# Altium PCB Print2.PcbDoc
Units mm, origin at the board's own origin, x right, y up, seen from the top; angles counter-clockwise.
Board outline 237.62 x 189.1 mm, 2 copper layers (Top Layer, Bottom Layer); 42 components, 0 nets, 250 pads, 0 vias.
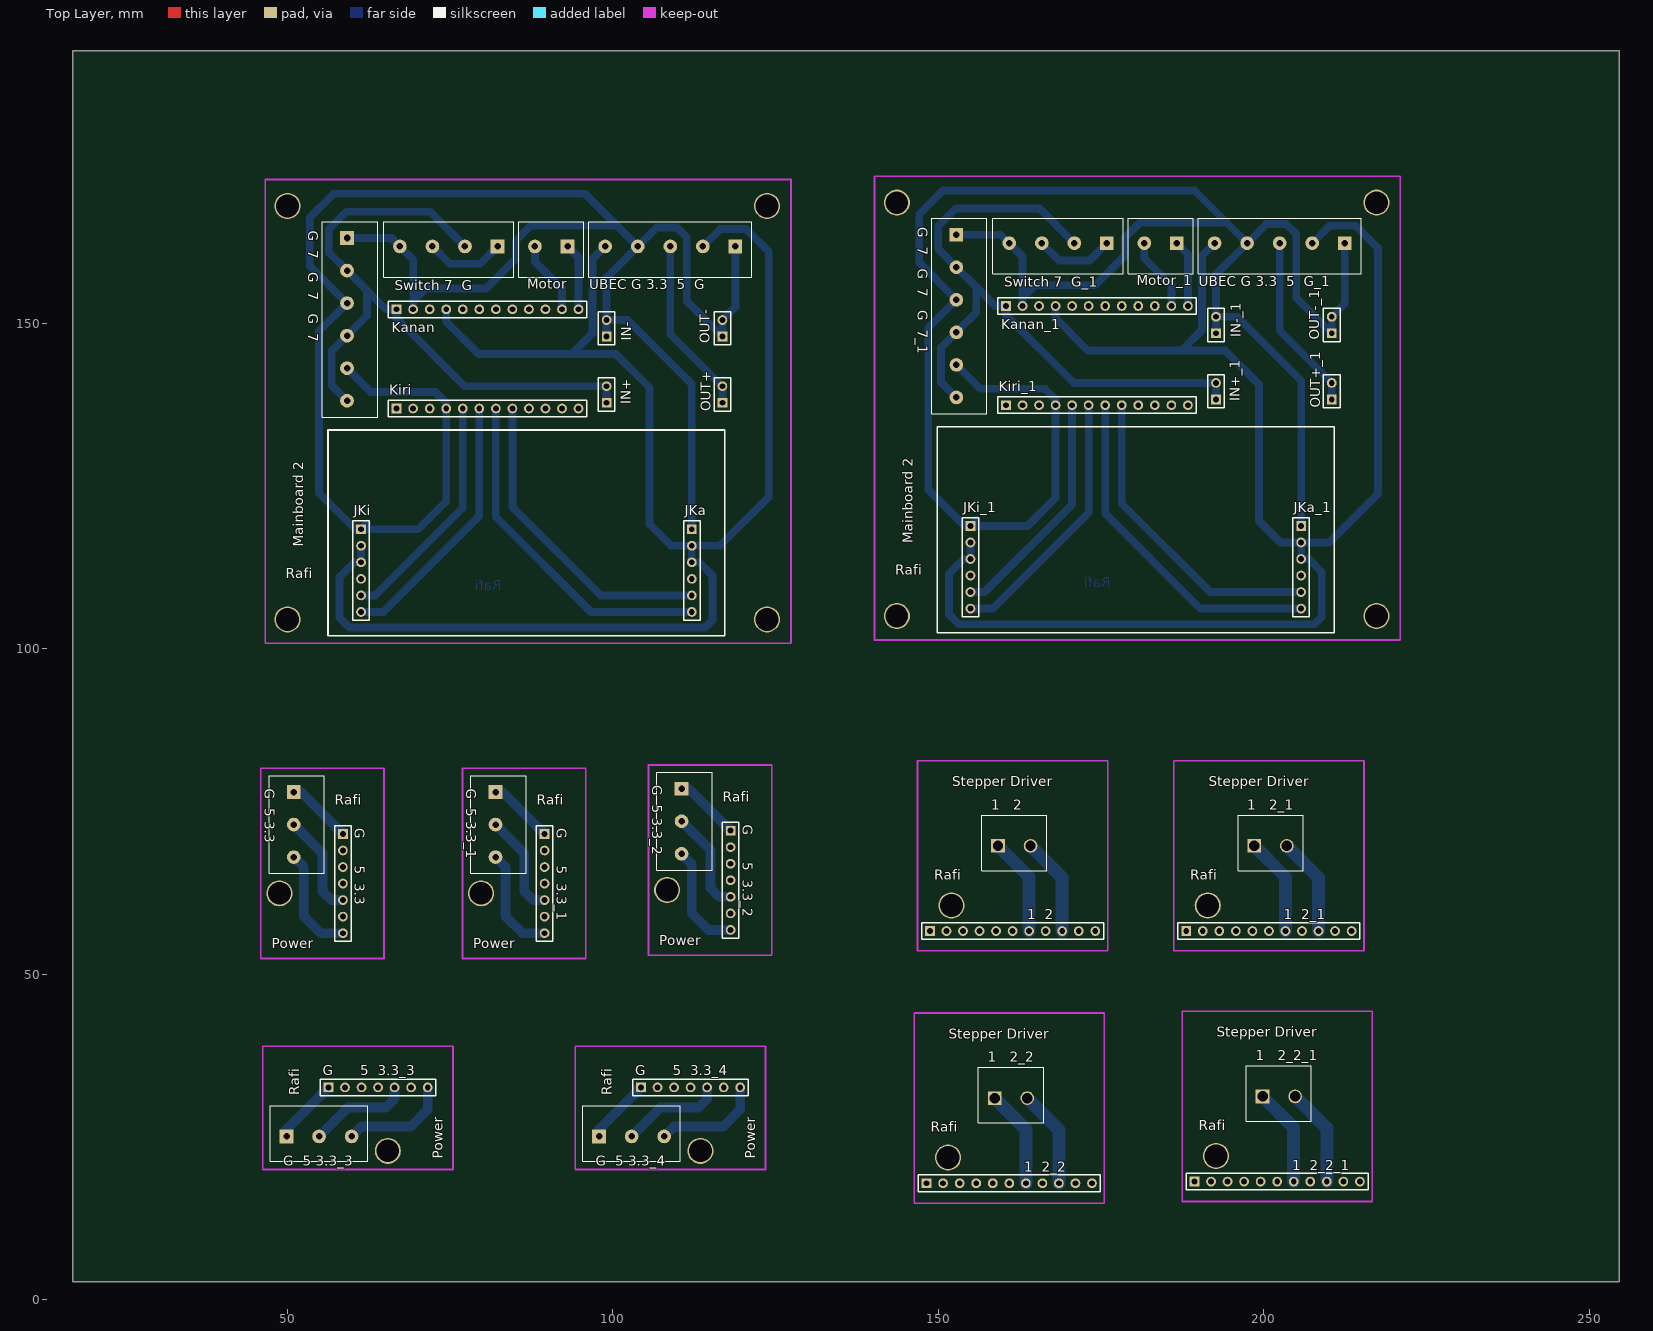
[diagram p0: Top Layer view]
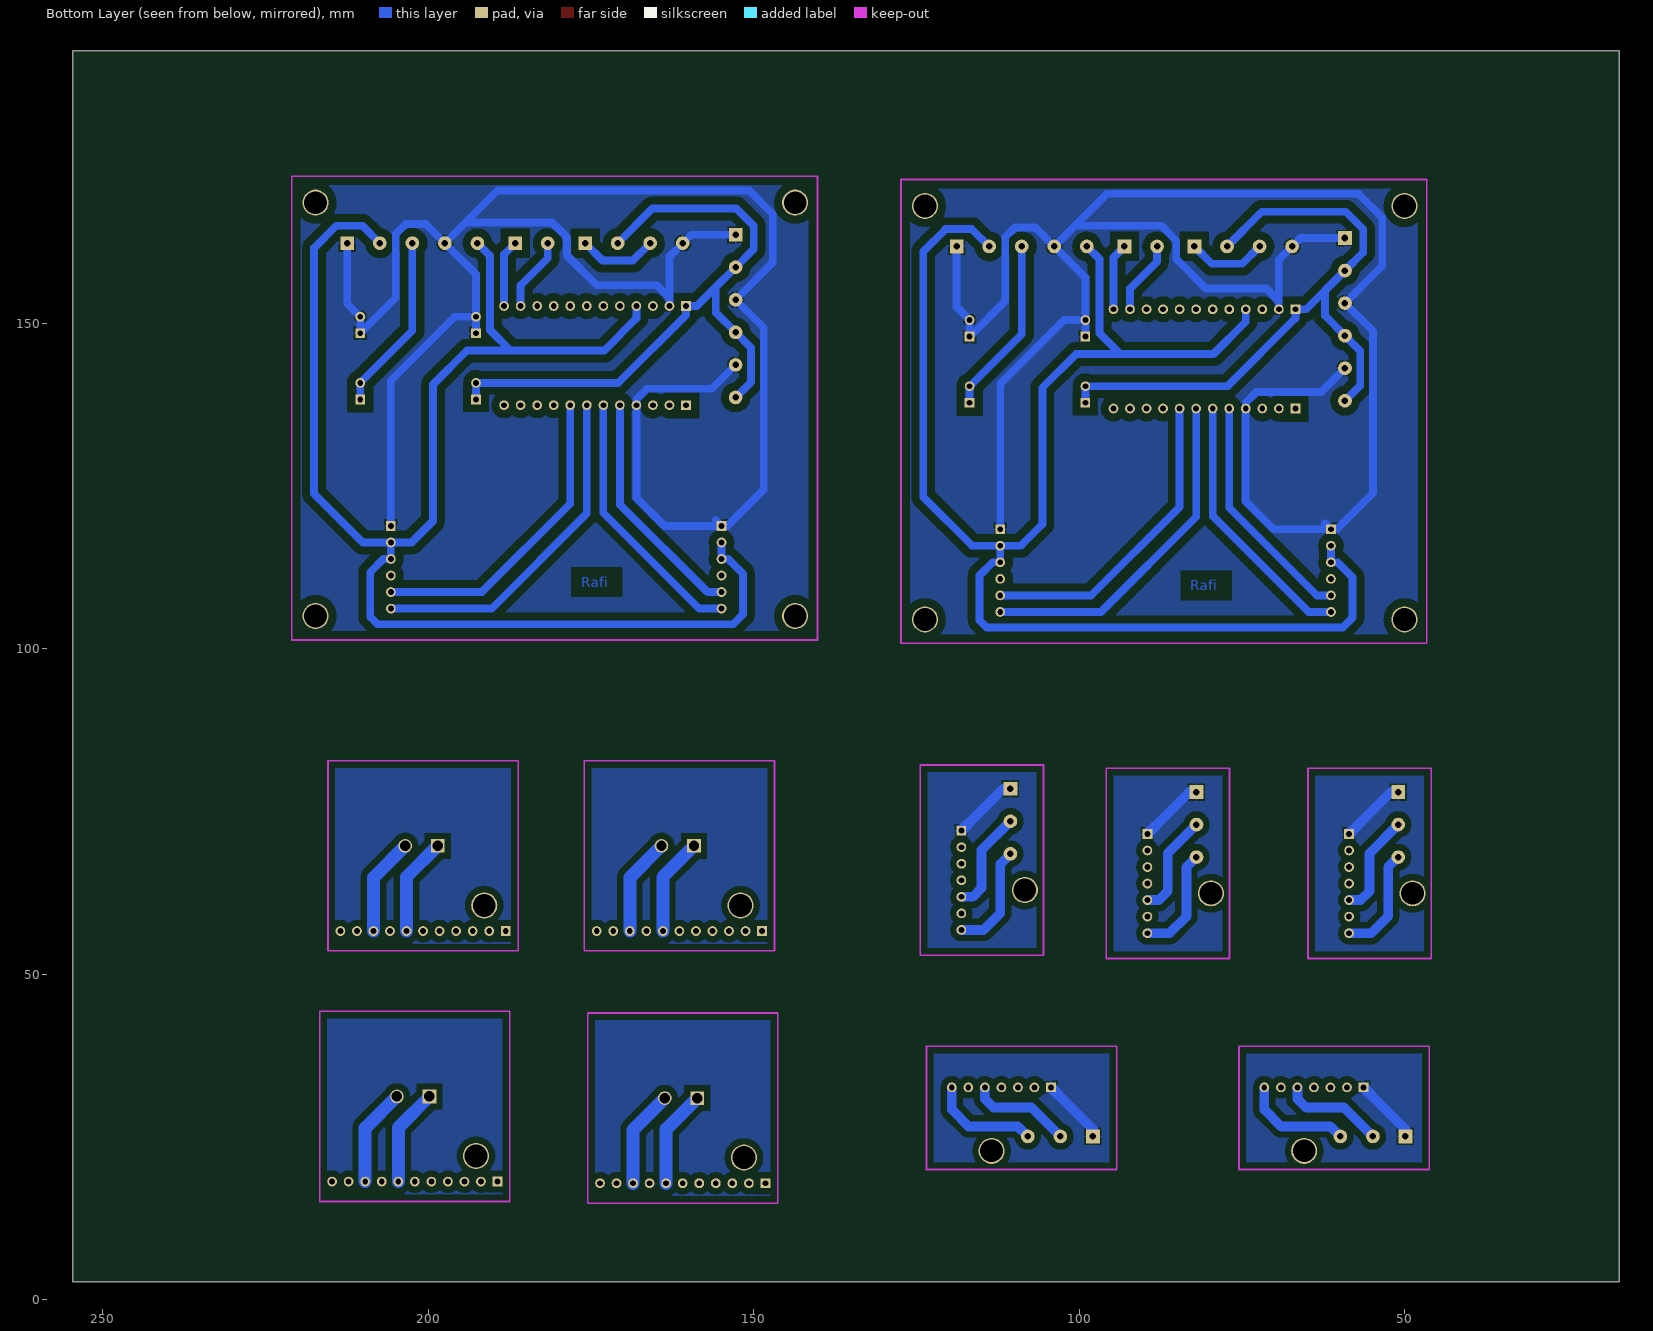
[diagram p1: Bottom Layer view, seen from below]

## Layer stack, top to bottom
Top Solder: solder mask 0.0102, Solder Resist, Dk 3.5
Top Layer: signal copper 0.0356
Dielectric 1: dielectric 0.32, FR-4, Dk 4.8
Bottom Layer: signal copper 0.0356
Bottom Solder: solder mask 0.0102, Solder Resist, Dk 3.5

## Board outline
17.018,2.794 17.018,191.897 254.635,191.897 254.635,2.794

## Design rules (kind name [scope] priority, off if disabled: settings)
Clearance [All] p1: gap=0.25
PolygonConnect [All] p1: connectstyle=Relief reliefconductorwidth=0.254 reliefentries=4 polygonreliefangle="90 Angle" airgapwidth=0.254
RoomDefinition stepper_2 [InComponentClass('stepper')] p1: confinementstyle=ConfineIn formatcopy=TRUE lockcomponents=FALSE outline 41.275,-38.735 92.075,-38.735 92.075,-13.335 41.275,-13.335
RoutingVias [All] p1: holewidth=0.711 width=1.27 viastyle="Through Hole" minholewidth=0.711 minwidth=1.27 maxholewidth=0.711 maxwidth=1.27
SolderMaskExpansion [All] p1: expansion=0.102
Width [All] p1: maxlimit=3 minlimit=0.254 preferedwidth=1
30 further rules are at their usual default settings.

## Components (designator, comment, footprint, x,y, rotation, side; value= is the part's Value field where it differs from the comment)
"1  2" "Header 11" HDR1X11 148.717,56.642 r0 top (schematic designator P?)
"1  2_1" "Header 11" HDR1X11 188.087,56.642 r0 top (schematic designator P?)
"1  2_2" "Header 11" HDR1X11 148.209,17.907 r0 top (schematic designator P?)
"1  2_2_1" "Header 11" HDR1X11 189.357,18.161 r0 top (schematic designator P?)
"1   2" "WE-Terminal Blocks Plugable Type 691311700002" 691311700002#1 161.671,69.723 r0 top (schematic designator C?)
"1   2_1" "WE-Terminal Blocks Plugable Type 691311700002" 691311700002#1 201.041,69.723 r0 top (schematic designator C?)
"1   2_2" "WE-Terminal Blocks Plugable Type 691311700002" 691311700002#1 161.163,30.988 r0 top (schematic designator C?)
"1   2_2_1" "WE-Terminal Blocks Plugable Type 691311700002" 691311700002#1 202.311,31.242 r0 top (schematic designator C?)
"G  5 3.3" "WE-Terminal Blocks Plugable Type 691311700003" 691311700003 51.003,73 r270 top (schematic designator C?)
"G  5 3.3_1" "WE-Terminal Blocks Plugable Type 691311700003" 691311700003 81.991,73 r270 top (schematic designator C?)
"G  5 3.3_2" "WE-Terminal Blocks Plugable Type 691311700003" 691311700003 110.566,73.508 r270 top (schematic designator C?)
"G  5 3.3_3" "WE-Terminal Blocks Plugable Type 691311700003" 691311700003 54.889,25.095 r0 top (schematic designator C?)
"G  5 3.3_4" "WE-Terminal Blocks Plugable Type 691311700003" 691311700003 102.895,25.095 r0 top (schematic designator C?)
"G  7   G  7   G  7" "WE-Terminal Blocks Plugable Type 691311700006" 691311700006 59.182,150.599 r270 top (schematic designator "Out 7V")
"G  7   G  7   G  7_1" "WE-Terminal Blocks Plugable Type 691311700006" 691311700006 152.781,151.107 r270 top (schematic designator "Out 7V")
"G      5  3.3" "Header 7" HDR1X7 58.547,71.557 r270 top (schematic designator P?)
"G      5  3.3_1" "Header 7" HDR1X7 89.535,71.557 r270 top (schematic designator P?)
"G      5  3.3_2" "Header 7" HDR1X7 118.11,72.065 r270 top (schematic designator P?)
"G      5  3.3_3" "Header 7" HDR1X7 56.332,32.639 r0 top (schematic designator P?)
"G      5  3.3_4" "Header 7" HDR1X7 104.338,32.639 r0 top (schematic designator P?)
IN+ "Header 2" HDR1X2 99.06,137.795 r90 top
IN+_1 "Header 2" HDR1X2 192.659,138.303 r90 top (schematic designator IN+)
IN- "Header 2" HDR1X2 99.06,147.955 r90 top
IN-_1 "Header 2" HDR1X2 192.659,148.463 r90 top (schematic designator IN-)
JKa "Header 6" HDR1X6 112.141,118.364 r270 top
JKa_1 "Header 6" HDR1X6 205.74,118.872 r270 top (schematic designator JKa)
JKi "Header 6" HDR1X6 61.341,118.364 r270 top
JKi_1 "Header 6" HDR1X6 154.94,118.872 r270 top (schematic designator JKi)
Kanan "Header 12" HDR1X12 66.802,152.146 r0 top
Kanan_1 "Header 12" HDR1X12 160.401,152.654 r0 top (schematic designator Kanan)
Kiri "Header 12" HDR1X12 66.802,136.906 r0 top
Kiri_1 "Header 12" HDR1X12 160.401,137.414 r0 top (schematic designator Kiri)
Motor "WE-Terminal Blocks Plugable Type 691311700002" 691311700002#2 90.551,161.799 r180 top
Motor_1 "WE-Terminal Blocks Plugable Type 691311700002" 691311700002#2 184.15,162.307 r180 top (schematic designator Motor)
OUT+ "Header 2" HDR1X2 116.84,137.795 r90 top
OUT+_1 "Header 2" HDR1X2 210.439,138.303 r90 top (schematic designator OUT+)
OUT- "Header 2" HDR1X2 116.84,147.955 r90 top
OUT-_1 "Header 2" HDR1X2 210.439,148.463 r90 top (schematic designator OUT-)
"Switch 7  G" "WE-Terminal Blocks Plugable Type 691311700004" 691311700004 74.803,161.799 r180 top (schematic designator "Source n Saklar")
"Switch 7  G_1" "WE-Terminal Blocks Plugable Type 691311700004" 691311700004 168.402,162.307 r180 top (schematic designator "Source n Saklar")
"UBEC G 3.3  5  G" "WE-Terminal Blocks Plugable Type 691311700005" 691311700005 108.839,161.799 r180 top (schematic designator "Out n Ubec5 In")
"UBEC G 3.3  5  G_1" "WE-Terminal Blocks Plugable Type 691311700005" 691311700005 202.438,162.307 r180 top (schematic designator "Out n Ubec5 In")

## Footprints (in the part's own frame and the unit in brackets; to place one, negate y for a bottom-side part, rotate by r counter-clockwise, add the part's x,y. Pads: shape width x height; smd on the part's side, far side on the other; paste and mask are expansions set on the pad)
691311700002#1 [mm] "5.00mm - Open Vertical PCB Header - 02p"
  rect 2.1x2.1 hole 1.6: 1(-2.5,0)
  round 2.1 hole 1.6: 2(2.5,0)
  silkscreen extent -5,-3.8 5,4.7, body extent -5,-3.8 5,4.7, height 12.01
691311700002#2 [mm] "5.00mm - Open Vertical PCB Header - 02p"
  rect 2.1x2.1 hole 1: 1(-2.5,0)
  round 2.1 hole 1: 2(2.5,0)
  silkscreen extent -5,-3.8 5,4.7, body extent -5,-3.8 5,4.7, height 12.01
691311700003 [mm] "5.00mm - Open Vertical PCB Header - 03p"
  rect 2.1x2.1 hole 1: 1(-5,0)
  round 2.1 hole 1: 2(0,0) 3(5,0)
  silkscreen extent -7.5,-3.8 7.5,4.7, body extent -7.5,-3.8 7.5,4.7, height 12.01
691311700004 [mm] "5.00mm - Open Vertical PCB Header - 04p"
  rect 2.1x2.1 hole 1: 1(-7.5,0)
  round 2.1 hole 1: 2(-2.5,0) 3(2.5,0) 4(7.5,0)
  silkscreen extent -10,-3.8 10,4.7, body extent -10,-3.8 10,4.7, height 12.01
691311700005 [mm] "5.00mm - Open Vertical PCB Header - 05p"
  rect 2.1x2.1 hole 1: 1(-10,0)
  round 2.1 hole 1: 2(-5,0) 3(0,0) 4(5,0) 5(10,0)
  silkscreen extent -12.5,-3.8 12.5,4.7, body extent -12.5,-3.8 12.5,4.7, height 12.01
691311700006 [mm] "5.00mm - Open Vertical PCB Header - 06p"
  rect 2.1x2.1 hole 1: 1(-12.5,0)
  round 2.1 hole 1: 2(-7.5,0) 3(-2.5,0) 4(2.5,0) 5(7.5,0) 6(12.5,0)
  silkscreen extent -15,-3.8 15,4.7, body extent -15,-3.8 15,4.7, height 12.01
HDR1X2 [mm] "Connector; Header; 2 Position"
  rect 1.5x1.5 hole 0.9: 1(0,0)
  round 1.5 hole 0.9: 2(2.54,0)
  silkscreen extent -1.27,-1.27 3.81,1.27
HDR1X6 [mm] "Connector; Header; 6 Position"
  rect 1.5x1.5 hole 0.9: 1(0,0)
  round 1.5 hole 0.9: 2(2.54,0) 3(5.08,0) 4(7.62,0) 5(10.16,0) 6(12.7,0)
  silkscreen extent -1.27,-1.27 13.97,1.27
HDR1X7 [mm] "Connector; Header; 7 Position"
  rect 1.5x1.5 hole 0.9: 1(0,0)
  round 1.5 hole 0.9: 2(2.54,0) 3(5.08,0) 4(7.62,0) 5(10.16,0) 6(12.7,0) 7(15.24,0)
  silkscreen extent -1.27,-1.27 16.51,1.27
HDR1X11 [mm] "Connector; Header; 11 Position"
  rect 1.5x1.5 hole 0.9: 1(0,0)
  round 1.5 hole 0.9: 2(2.54,0) 3(5.08,0) 4(7.62,0) 5(10.16,0) 6(12.7,0) 7(15.24,0) 8(17.78,0) 9(20.32,0) 10(22.86,0) 11(25.4,0)
  silkscreen extent -1.27,-1.27 26.67,1.27
HDR1X12 [mm] "Connector; Header; 12 Position"
  rect 1.5x1.5 hole 0.9: 1(0,0)
  round 1.5 hole 0.9: 2(2.54,0) 3(5.08,0) 4(7.62,0) 5(10.16,0) 6(12.7,0) 7(15.24,0) 8(17.78,0) 9(20.32,0) 10(22.86,0) 11(25.4,0) 12(27.94,0)
  silkscreen extent -1.27,-1.27 29.21,1.27

## Part data
"1  2" "1  2_1" "1  2_2" "1  2_2_1": "Header, 11-Pin"
"1   2" "1   2_1" "1   2_2" "1   2_2_1" "G  5 3.3" "G  5 3.3_1" "G  5 3.3_2" "G  5 3.3_3" "G  5 3.3_4" "G  7   G  7   G  7" "G  7   G  7   G  7_1" Motor Motor_1 "Switch 7  G" "Switch 7  G_1" "UBEC G 3.3  5  G" "UBEC G 3.3  5  G_1": "WR-TBL Terminal block - serie 3117 - 5.00mm"
"G      5  3.3" "G      5  3.3_1" "G      5  3.3_2" "G      5  3.3_3" "G      5  3.3_4": "Header, 7-Pin"
IN+ IN+_1 IN- IN-_1 OUT+ OUT+_1 OUT- OUT-_1: "Header, 2-Pin"
JKa JKa_1 JKi JKi_1: "Header, 6-Pin"
Kanan Kanan_1 Kiri Kiri_1: "Header, 12-Pin"

## Free pads (board coordinates)
  round 4 hole 3.5: 0(50.038,104.521) 0(50.038,168.021) 0(123.698,104.521) 0(123.698,168.021) 0(143.637,105.029) 0(143.637,168.529) 0(217.297,105.029) 0(217.297,168.529) 8(48.793,62.438) 8(48.793,62.438) 8(65.451,22.885) 8(65.451,22.885) 8(79.781,62.438) 8(79.781,62.438) 8(108.356,62.946) 8(108.356,62.946) 8(113.457,22.885) 8(113.457,22.885) 10(151.511,21.844) 10(151.511,21.844) 10(152.019,60.579) 10(152.019,60.579) 10(191.389,60.579) 10(191.389,60.579) 10(192.659,22.098) 10(192.659,22.098)

## Nets (pads, with @x,y where several pads share a name; then routed paths per layer and width w, separated by ;. In a path a pad name is that pad's centre, name@x,y a point inside that pad or via, vN(x,y) a via of type N, cw(c..) or ccw(c..) an arc to the next point about the centre after c; other vN are vias at no path point)
pads on no net: "1  2.1" "1  2.2" "1  2.3" "1  2.4" "1  2.5" "1  2.6" "1  2.7" "1  2.8" "1  2.9" "1  2.10" "1  2.11" "1  2_1.1" "1  2_1.2" "1  2_1.3" "1  2_1.4" "1  2_1.5" "1  2_1.6" "1  2_1.7" "1  2_1.8" "1  2_1.9" "1  2_1.10" "1  2_1.11" "1  2_2.1" "1  2_2.2" "1  2_2.3" "1  2_2.4" "1  2_2.5" "1  2_2.6" "1  2_2.7" "1  2_2.8" "1  2_2.9" "1  2_2.10" "1  2_2.11" "1  2_2_1.1" "1  2_2_1.2" "1  2_2_1.3" "1  2_2_1.4" "1  2_2_1.5" "1  2_2_1.6" "1  2_2_1.7" "1  2_2_1.8" "1  2_2_1.9" "1  2_2_1.10" "1  2_2_1.11" "1   2.1" "1   2.2" "1   2_1.1" "1   2_1.2" "1   2_2.1" "1   2_2.2" "1   2_2_1.1" "1   2_2_1.2" "G  5 3.3.1" "G  5 3.3.2" "G  5 3.3.3" "G  5 3.3_1.1" "G  5 3.3_1.2" "G  5 3.3_1.3" "G  5 3.3_2.1" "G  5 3.3_2.2" "G  5 3.3_2.3" "G  5 3.3_3.1" "G  5 3.3_3.2" "G  5 3.3_3.3" "G  5 3.3_4.1" "G  5 3.3_4.2" "G  5 3.3_4.3" "G  7   G  7   G  7.1" "G  7   G  7   G  7.2" "G  7   G  7   G  7.3" "G  7   G  7   G  7.4" "G  7   G  7   G  7.5" "G  7   G  7   G  7.6" "G  7   G  7   G  7_1.1" "G  7   G  7   G  7_1.2" "G  7   G  7   G  7_1.3" "G  7   G  7   G  7_1.4" "G  7   G  7   G  7_1.5" "G  7   G  7   G  7_1.6" "G      5  3.3.1" "G      5  3.3.2" "G      5  3.3.3" "G      5  3.3.4" "G      5  3.3.5" "G      5  3.3.6" "G      5  3.3.7" "G      5  3.3_1.1" "G      5  3.3_1.2" "G      5  3.3_1.3" "G      5  3.3_1.4" "G      5  3.3_1.5" "G      5  3.3_1.6" "G      5  3.3_1.7" "G      5  3.3_2.1" "G      5  3.3_2.2" "G      5  3.3_2.3" "G      5  3.3_2.4" "G      5  3.3_2.5" "G      5  3.3_2.6" "G      5  3.3_2.7" "G      5  3.3_3.1" "G      5  3.3_3.2" "G      5  3.3_3.3" "G      5  3.3_3.4" "G      5  3.3_3.5" "G      5  3.3_3.6" "G      5  3.3_3.7" "G      5  3.3_4.1" "G      5  3.3_4.2" "G      5  3.3_4.3" "G      5  3.3_4.4" "G      5  3.3_4.5" "G      5  3.3_4.6" "G      5  3.3_4.7" "Switch 7  G.1" "Switch 7  G.2" "Switch 7  G.3" "Switch 7  G.4" "Switch 7  G_1.1" "Switch 7  G_1.2" "Switch 7  G_1.3" "Switch 7  G_1.4" "UBEC G 3.3  5  G.1" "UBEC G 3.3  5  G.2" "UBEC G 3.3  5  G.3" "UBEC G 3.3  5  G.4" "UBEC G 3.3  5  G.5" "UBEC G 3.3  5  G_1.1" "UBEC G 3.3  5  G_1.2" "UBEC G 3.3  5  G_1.3" "UBEC G 3.3  5  G_1.4" "UBEC G 3.3  5  G_1.5" IN+.1 IN+.2 IN+_1.1 IN+_1.2 IN-.1 IN-.2 IN-_1.1 IN-_1.2 JKa.1 JKa.2 JKa.3 JKa.4 JKa.5 JKa.6 JKa_1.1 JKa_1.2 JKa_1.3 JKa_1.4 JKa_1.5 JKa_1.6 JKi.1 JKi.2 JKi.3 JKi.4 JKi.5 JKi.6 JKi_1.1 JKi_1.2 JKi_1.3 JKi_1.4 JKi_1.5 JKi_1.6 Kanan.1 Kanan.2 Kanan.3 Kanan.4 Kanan.5 Kanan.6 Kanan.7 Kanan.8 Kanan.9 Kanan.10 Kanan.11 Kanan.12 Kanan_1.1 Kanan_1.2 Kanan_1.3 Kanan_1.4 Kanan_1.5 Kanan_1.6 Kanan_1.7 Kanan_1.8 Kanan_1.9 Kanan_1.10 Kanan_1.11 Kanan_1.12 Kiri.1 Kiri.2 Kiri.3 Kiri.4 Kiri.5 Kiri.6 Kiri.7 Kiri.8 Kiri.9 Kiri.10 Kiri.11 Kiri.12 Kiri_1.1 Kiri_1.2 Kiri_1.3 Kiri_1.4 Kiri_1.5 Kiri_1.6 Kiri_1.7 Kiri_1.8 Kiri_1.9 Kiri_1.10 Kiri_1.11 Kiri_1.12 Motor.1 Motor.2 Motor_1.1 Motor_1.2 OUT+.1 OUT+.2 OUT+_1.1 OUT+_1.2 OUT-.1 OUT-.2 OUT-_1.1 OUT-_1.2
copper on no net: | length 2122.7
  Bottom Layer w1.2: 59.182,138.099 56.832,140.449 56.832,145.749 59.182,148.099 62.23,151.147 62.23,155.051 59.182,158.099 ; 59.182,143.099 62.835,139.446 72.771,139.446 74.422,137.795 74.422,136.906 74.422,122.682 70.104,118.364 61.341,118.364 ; 59.182,163.099 66.003,163.099 67.303,161.799 69.342,159.76 69.342,153.416 ; 61.341,105.664 64.77,105.664 79.502,120.396 79.502,136.906 ; 61.341,108.204 63.5,108.204 76.962,121.666 76.962,136.906 ; 61.341,115.824 61.341,113.284 60.325,113.284 58.039,110.998 58.039,104.775 59.538,103.276 114.198,103.276 115.316,104.394 115.316,111.252 113.284,113.284 112.141,113.284 112.141,115.824 ; 62.23,119.253 61.341,118.364 ; 69.342,152.146 69.342,153.416 ; 72.303,161.799 74.971,159.131 79.635,159.131 82.303,161.799 ; 74.422,152.146 74.422,150.241 79.375,145.288 100.457,145.288 105.664,140.081 105.664,119.126 108.966,115.824 112.141,115.824 ; 77.303,161.799 71.97,167.132 59.08,167.132 56.388,164.44 56.388,160.893 59.182,158.099 ; 82.042,136.906 82.042,120.269 96.647,105.664 112.141,105.664 ; 84.582,136.906 84.582,121.793 98.171,108.204 112.141,108.204 ; 88.051,161.799 88.051,159.472 92.202,155.321 92.202,152.146 ; 93.051,161.799 94.742,160.108 94.742,152.146 ; 93.726,145.288 96.901,148.463 96.901,159.861 98.839,161.799 ; 99.06,137.795 99.06,140.335 77.216,140.335 66.802,150.749 66.802,152.146 65.135,152.146 59.182,158.099 ; 99.06,147.955 99.06,150.495 ; 100.665,164.973 87.376,164.973 85.09,162.687 85.09,159.893 80.518,155.321 71.247,155.321 69.342,153.416 ; 108.839,161.799 108.839,148.336 116.84,140.335 116.84,137.795 ; 112.141,118.364 112.141,140.665 102.311,150.495 99.06,150.495 ; 113.839,161.799 116.505,164.465 120.523,164.465 123.952,161.036 123.952,123.317 116.459,115.824 112.141,115.824 ; 118.839,161.799 118.839,152.494 116.84,150.495 116.84,147.955 111.379,153.416 111.379,163.195 109.855,164.719 106.759,164.719 103.839,161.799 ; 152.781,138.607 150.431,140.957 150.431,146.257 152.781,148.607 155.829,151.655 155.829,155.559 152.781,158.607 ; 152.781,143.607 156.434,139.954 166.37,139.954 168.021,138.303 168.021,137.414 168.021,123.19 163.703,118.872 154.94,118.872 ; 152.781,163.607 159.602,163.607 160.902,162.307 162.941,160.268 162.941,153.924 ; 154.94,106.172 158.369,106.172 173.101,120.904 173.101,137.414 ; 154.94,108.712 157.099,108.712 170.561,122.174 170.561,137.414 ; 154.94,116.332 154.94,113.792 153.924,113.792 151.638,111.506 151.638,105.283 153.137,103.784 207.797,103.784 208.915,104.902 208.915,111.76 206.883,113.792 205.74,113.792 205.74,116.332 ; 155.829,119.761 154.94,118.872 ; 162.941,152.654 162.941,153.924 ; 165.902,162.307 168.57,159.639 173.234,159.639 175.902,162.307 ; 168.021,152.654 168.021,150.749 172.974,145.796 194.056,145.796 199.263,140.589 199.263,119.634 202.565,116.332 205.74,116.332 ; 170.902,162.307 165.569,167.64 152.679,167.64 149.987,164.948 149.987,161.401 152.781,158.607 ; 175.641,137.414 175.641,120.777 190.246,106.172 205.74,106.172 ; 178.181,137.414 178.181,122.301 191.77,108.712 205.74,108.712 ; 181.65,162.307 181.65,159.98 185.801,155.829 185.801,152.654 ; 186.65,162.307 188.341,160.616 188.341,152.654 ; 187.325,145.796 190.5,148.971 190.5,160.369 192.438,162.307 ; 192.659,138.303 192.659,140.843 170.815,140.843 160.401,151.257 160.401,152.654 158.734,152.654 152.781,158.607 ; 192.659,148.463 192.659,151.003 ; 194.264,165.481 180.975,165.481 178.689,163.195 178.689,160.401 174.117,155.829 164.846,155.829 162.941,153.924 ; 202.438,162.307 202.438,148.844 210.439,140.843 210.439,138.303 ; 205.74,118.872 205.74,141.173 195.91,151.003 192.659,151.003 ; 207.438,162.307 210.104,164.973 214.122,164.973 217.551,161.544 217.551,123.825 210.058,116.332 205.74,116.332 ; 212.438,162.307 212.438,153.002 210.439,151.003 210.439,148.463 204.978,153.924 204.978,163.703 203.454,165.227 200.358,165.227 197.438,162.307 ; 61.341,118.364 60.452,118.364 54.864,123.952 54.864,148.781 59.182,153.099 53.467,158.814 53.467,166.243 57.125,169.901 95.738,169.901 103.839,161.799 ; 99.06,150.495 99.06,157.02 103.839,161.799 ; 154.94,118.872 154.051,118.872 148.463,124.46 148.463,149.289 152.781,153.607 147.066,159.322 147.066,166.751 150.724,170.409 189.337,170.409 197.438,162.307 ; 192.659,151.003 192.659,157.528 197.438,162.307
  Bottom Layer w1.5: 49.889,25.095 49.889,26.196 56.332,32.639 ; 51.003,68 52.553,66.45 52.553,58.903 55.138,56.317 58.547,56.317 ; 51.003,73 55.435,68.567 55.435,62.751 56.789,61.397 58.547,61.397 ; 51.003,78 52.104,78 58.547,71.557 ; 54.889,25.095 59.322,29.527 65.138,29.527 66.492,30.881 66.492,32.639 ; 59.889,25.095 61.439,26.645 68.986,26.645 71.572,29.23 71.572,32.639 ; 81.991,68 83.541,66.45 83.541,58.903 86.126,56.317 89.535,56.317 ; 81.991,73 86.423,68.567 86.423,62.751 87.777,61.397 89.535,61.397 ; 81.991,78 83.092,78 89.535,71.557 ; 97.895,25.095 97.895,26.196 104.338,32.639 ; 102.895,25.095 107.328,29.527 113.144,29.527 114.498,30.881 114.498,32.639 ; 107.895,25.095 109.445,26.645 116.992,26.645 119.578,29.23 119.578,32.639 ; 110.566,68.508 112.116,66.958 112.116,59.411 114.701,56.825 118.11,56.825 ; 110.566,73.508 114.998,69.075 114.998,63.259 116.352,61.905 118.11,61.905 ; 110.566,78.508 111.667,78.508 118.11,72.065
  Bottom Layer w2: 158.663,30.988 163.449,26.202 163.449,17.907 ; 159.171,69.723 163.957,64.937 163.957,56.642 ; 163.663,30.988 168.529,26.122 168.529,17.907 ; 164.171,69.723 169.037,64.857 169.037,56.642 ; 198.541,69.723 203.327,64.937 203.327,56.642 ; 199.811,31.242 204.597,26.456 204.597,18.161 ; 203.541,69.723 208.407,64.857 208.407,56.642 ; 204.811,31.242 209.677,26.376 209.677,18.161

## Polygon pours and split planes (outlines as drawn)
no net on Bottom Layer "Bottom Layer-GND" (solid, pour order 2): 187.452,44.323 187.452,15.113 216.662,15.113 216.662,44.323 187.452,44.323
no net on Bottom Layer "Bottom Layer-GND" (solid, pour order 2): 146.304,44.069 146.304,14.859 175.514,14.859 175.514,44.069 146.304,44.069
no net on Bottom Layer "Bottom Layer-GND" (solid, pour order 2): 186.182,82.804 186.182,53.594 215.392,53.594 215.392,82.804 186.182,82.804
no net on Bottom Layer "Bottom Layer-GND" (solid, pour order 2): 146.812,82.804 146.812,53.594 176.022,53.594 176.022,82.804 146.812,82.804
no net on Bottom Layer "Bottom Layer-GND" (solid, pour order 15): 140.208,101.346 140.208,172.593 220.98,172.593 220.98,101.346 140.208,101.346
no net on Bottom Layer "Bottom Layer-GND" (solid, pour order 15): 46.609,100.838 46.609,172.085 127.381,172.085 127.381,100.838 46.609,100.838
no net on Bottom Layer "Bottom Layer-GND" (solid, pour order 23): 94.254,20.015 94.254,38.964 123.464,38.964 123.464,20.015 94.254,20.015
no net on Bottom Layer "Bottom Layer-GND" (solid, pour order 21): 46.248,20.015 46.248,38.964 75.458,38.964 75.458,20.015 46.248,20.015
no net on Bottom Layer "Bottom Layer-GND" (solid, pour order 19): 105.486,82.149 124.435,82.149 124.435,52.939 105.486,52.939 105.486,82.149
no net on Bottom Layer "Bottom Layer-GND" (solid, pour order 17): 76.911,81.641 95.86,81.641 95.86,52.431 76.911,52.431 76.911,81.641
no net on Bottom Layer "Bottom Layer-GND" (solid, pour order 15): 45.923,81.641 64.872,81.641 64.872,52.431 45.923,52.431 45.923,81.641

## Keep-outs
Keep-Out Layer:
  lines w0.254: 45.923,52.431 64.872,52.431 64.872,81.641 45.923,81.641 45.923,52.431 ; 46.248,20.015 46.248,38.964 75.458,38.964 75.458,20.015 46.248,20.015 ; 46.609,100.838 127.381,100.838 127.381,172.085 46.609,172.085 46.609,100.838 ; 76.911,52.431 95.86,52.431 95.86,81.641 76.911,81.641 76.911,52.431 ; 94.254,20.015 94.254,38.964 123.464,38.964 123.464,20.015 94.254,20.015 ; 105.486,52.939 124.435,52.939 124.435,82.149 105.486,82.149 105.486,52.939 ; 140.208,101.346 220.98,101.346 220.98,172.593 140.208,172.593 140.208,101.346 ; 146.304,14.859 175.514,14.859 175.514,44.069 146.304,44.069 146.304,14.859 ; 146.812,53.594 176.022,53.594 176.022,82.804 146.812,82.804 146.812,53.594 ; 186.182,53.594 215.392,53.594 215.392,82.804 186.182,82.804 186.182,53.594 ; 187.452,15.113 187.452,44.323 216.662,44.323 216.662,15.113 187.452,15.113

## Other copper
Bottom Layer:
  text "Rafi" at 176.53,109.474 h1.52
  text "Rafi" at 82.931,108.966 h1.52

## Silkscreen, mask and mechanical layers (free items; w line width, h text height)
Top Overlay:
  lines w0.254: 56.261,101.981 117.221,101.981 117.221,133.604 56.261,133.604 56.261,101.981 ; 149.86,102.489 210.82,102.489 210.82,134.112 149.86,134.112 149.86,102.489
  text "Mainboard 2" at 146.05,116.205 h1.52 r90
  text "Mainboard 2" at 52.451,115.697 h1.52 r90
  text "Rafi" at 143.383,111.379 h1.52
  text "Rafi" at 49.784,110.871 h1.52
  text "Stepper Driver" at 152.146,78.867 h1.52
  text "Stepper Driver" at 191.516,78.867 h1.52
  text "Rafi" at 116.865,76.53 h1.52
  text "Rafi" at 57.302,76.022 h1.52
  text "Rafi" at 88.29,76.022 h1.52
  text "Rafi" at 149.352,64.516 h1.52
  text "Rafi" at 188.722,64.516 h1.52
  text "Power" at 107.163,54.483 h1.52
  text "Power" at 47.6,53.975 h1.52
  text "Power" at 78.588,53.975 h1.52
  text "Stepper Driver" at 192.786,40.386 h1.52
  text "Stepper Driver" at 151.638,40.132 h1.52
  text "Rafi" at 51.867,31.394 h1.52 r90
  text "Rafi" at 99.873,31.394 h1.52 r90
  text "Rafi" at 189.992,26.035 h1.52
  text "Rafi" at 148.844,25.781 h1.52
  text "Power" at 73.914,21.692 h1.52 r90
  text "Power" at 121.92,21.692 h1.52 r90